# Altium PCB Power Regulation.PcbDoc
Units mil, origin at the board's own origin, x right, y up, seen from the top; angles counter-clockwise.
Board outline 6000 x 4000 mil, 2 copper layers (Top Layer, Bottom Layer); 5 components, 4 nets, 15 pads, 1 vias.
Unrouted connection lines stored in the file: 4.
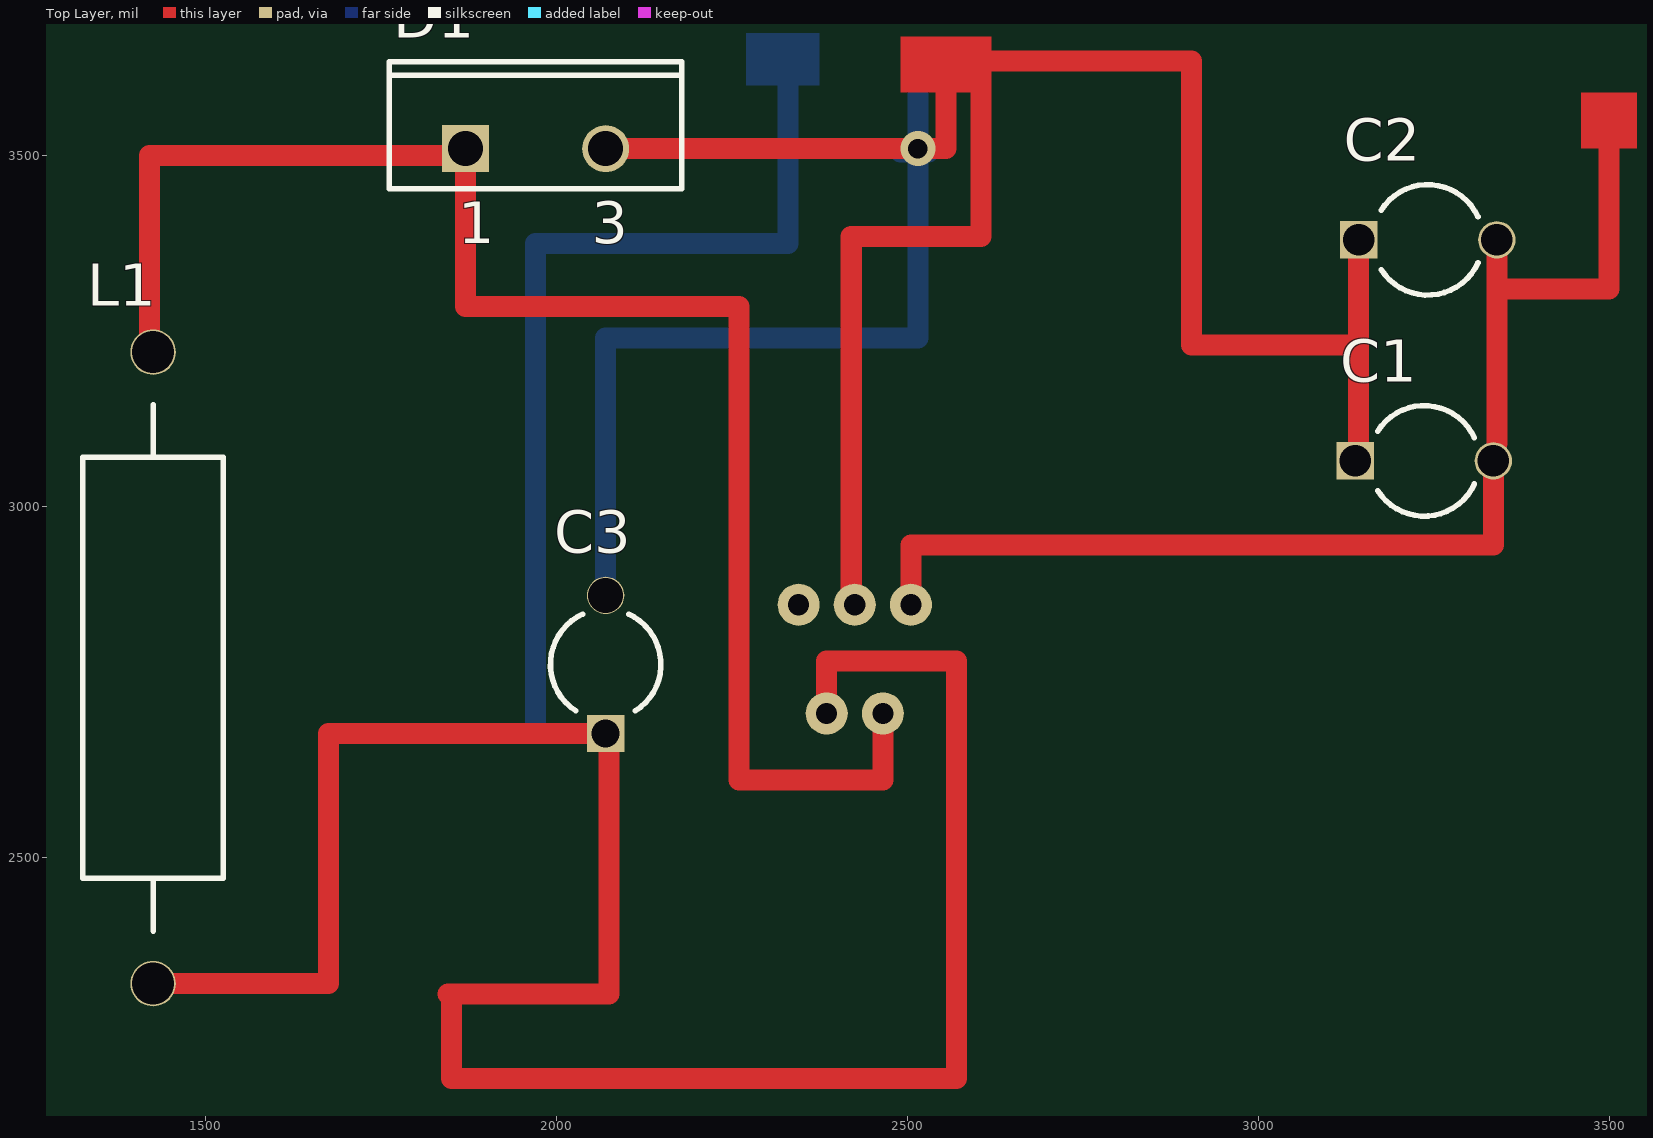
[diagram p0: Top Layer view]
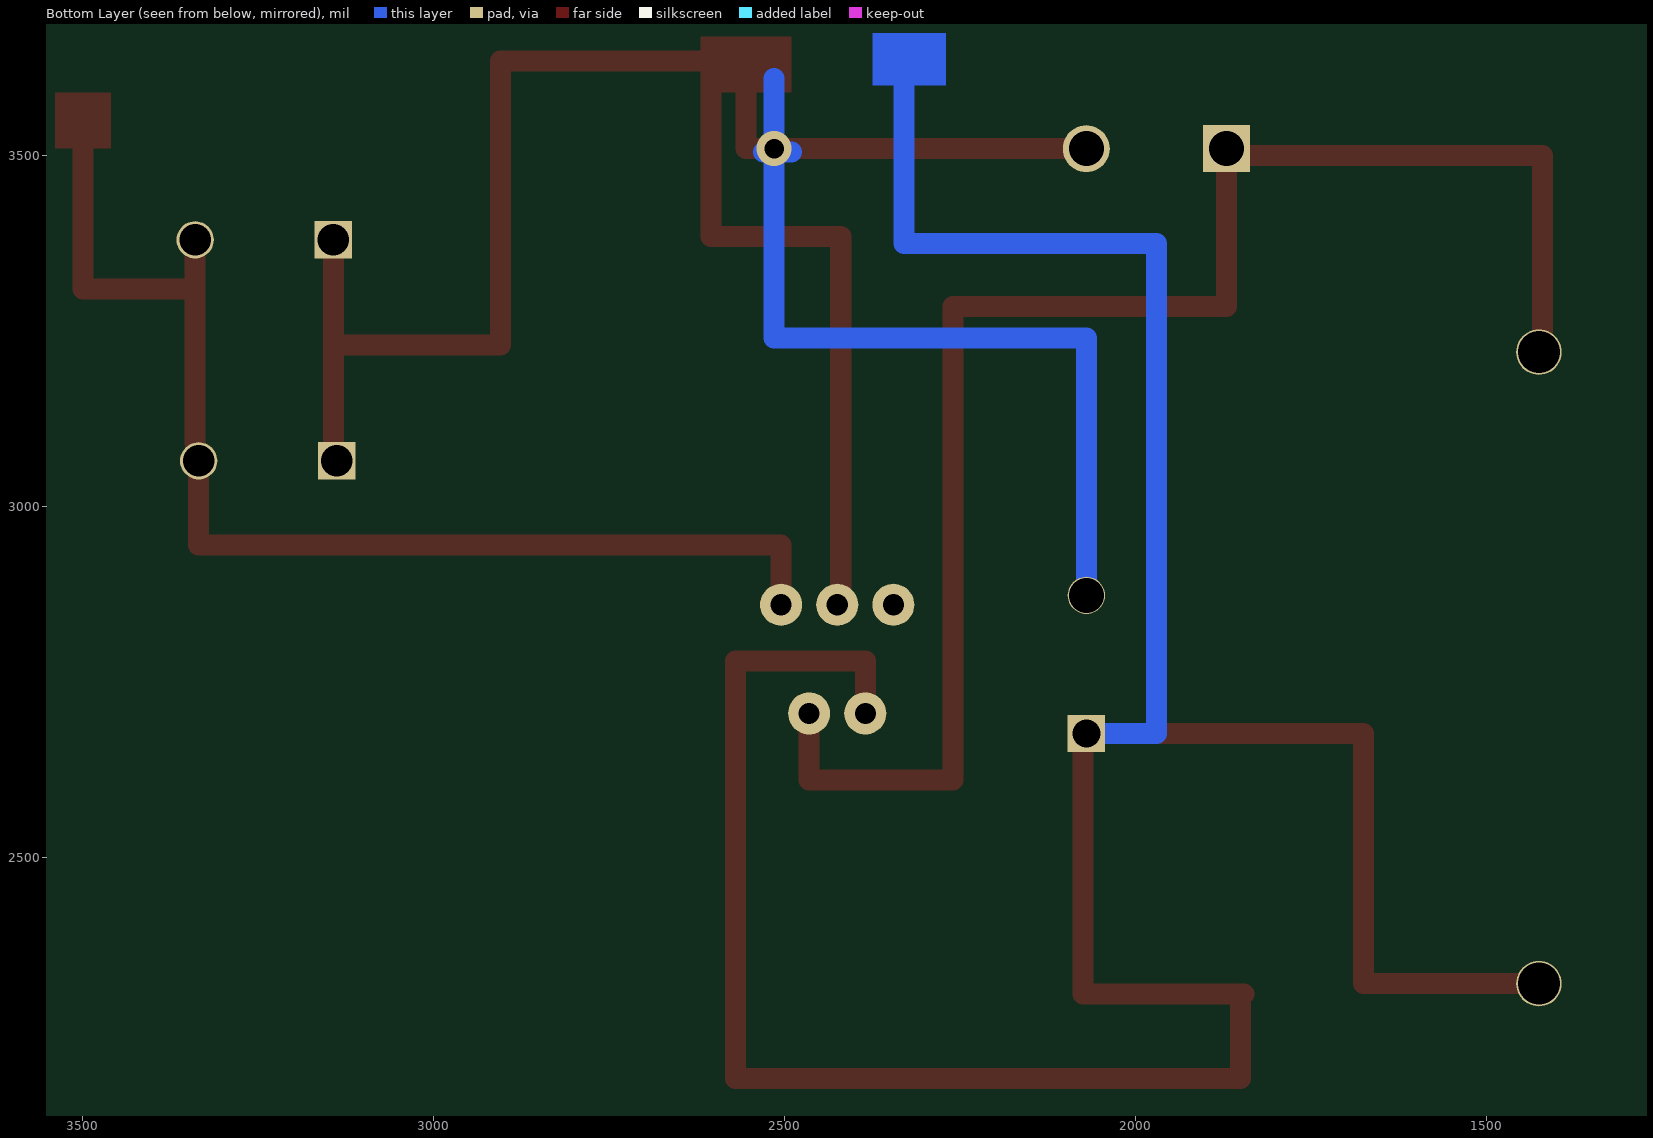
[diagram p1: Bottom Layer view, seen from below]

## Layer stack, top to bottom
Top Solder: solder mask 0.4, Solder Resist, Dk 3.5
Top Layer: signal copper 1.4
Dielectric 1: dielectric 12.6, FR-4, Dk 4.8
Bottom Layer: signal copper 1.4
Bottom Solder: solder mask 0.4, Solder Resist, Dk 3.5

## Board outline
1000,1000 7000,1000 7000,5000 1000,5000

## Design rules (kind name [scope] priority, off if disabled: settings)
Clearance [All] p1: gap=10
PolygonConnect [All] p1: connectstyle=Relief reliefconductorwidth=10 reliefentries=4 polygonreliefangle="90 Angle" airgapwidth=10
RoutingVias [All] p1: holewidth=28 width=50 viastyle="Through Hole" minholewidth=28 minwidth=50 maxholewidth=28 maxwidth=50
SolderMaskExpansion [All] p1: expansion=4
Width [All] p1: maxlimit=10 minlimit=10 preferedwidth=10
30 further rules are at their usual default settings.

## Components (designator, comment, footprint, x,y, rotation, side; value= is the part's Value field where it differs from the comment)
C1 "Cap2" CAPR5-4X5#1 3236.57,3065 r0 top
C2 "Cap2" CAPR5-4X5#1 3241.57,3380 r0 top
C3 "Cap2" CAPR5-4X5#2 2070,2775 r90 top
D1 "Diode 10TQ040" TO-220AC 1970,3510 r0 top
L1 "Inductor Iron" AXIAL-0.9 1425,2770 r270 top

## Footprints (in the part's own frame and the unit in brackets; to place one, negate y for a bottom-side part, rotate by r counter-clockwise, add the part's x,y. Pads: shape width x height; smd on the part's side, far side on the other; paste and mask are expansions set on the pad)
AXIAL-0.9 [mm] "Axial Device, Thru-Hole; 2 Leads; 0.9 in Pin Spacing"
  round 1.65 hole 1.524: 1(-11.43,0) 2(11.43,0)
  silkscreen extent -9.53,-2.54 9.53,2.54
CAPR5-4X5#1 [mm] "Capacitor; 2 Leads"
  rect 1.35x1.35 hole 1.143: 1(-2.5,0)
  round 1.35 hole 1.143: 2(2.5,0)
  silkscreen extent -1.69,-2 1.82,2
CAPR5-4X5#2 [mm] "Capacitor; 2 Leads"
  rect 1.35x1.35 hole 1.016: 1(-2.5,0)
  round 1.35 hole 1.27: 2(2.5,0)
  silkscreen extent -1.69,-2 1.82,2
TO-220AC [mm] "TO, Thru-Hole, Vertical, Heatsink Mounted; 3 In-Line Leads (1 Absent); Pitch 2.54 mm"
  rect 1.7x1.7 hole 1.27: 1(-2.54,0)
  round 1.7 hole 1.27: 3(2.54,0)
  silkscreen extent -5.3,-1.45 5.3,3.15

## Part data
C1 C2 C3: "Capacitor"
D1: "Schottky Rectifier"
L1: "Magnetic-Core Inductor"

## Free pads (board coordinates)
  round 60 hole 30: 0(2345,2860) 1(2425,2860) 2(2505,2860) 3(2385,2705) 4(2465,2705)

## Via types
v1: diameter 50, hole 28, Top Layer to Bottom Layer, 1 vias

## Nets (pads, with @x,y where several pads share a name; then routed paths per layer and width w, separated by ;. In a path a pad name is that pad's centre, name@x,y a point inside that pad or via, vN(x,y) a via of type N, cw(c..) or ccw(c..) an arc to the next point about the centre after c; other vN are vias at no path point)
GND: C1.2 C2.2 C3.2 D1.3 | length 290
  Top Layer w30: C1.2@3340,3090 C2.2
NetC3_1: C3.1 L1.2
NetD1_1: D1.1 L1.1
VCC: C1.1 C2.1 | length 290
  Top Layer w30: C1.1@3143.15,3090 C2.1
copper on no net: | length 12188.1
  Top Layer w10: 1845,2305 1850,2305 ; 1865,3500 1870,3500 ; 1870,3510 1875,3510 ; 2070,3510 2080,3510 ; 2380,2705 2385,2705 ; 2420,2860 2425,2860
  Top Layer w30: 1420,3235 1420,3500 1865,3500 ; 1425,2320 1675,2320 1675,2676.57 2075,2676.57 2075,2305 1845,2305 ; 1850,2305 1850,2185 2570,2185 2570,2780 2385,2780 2385,2705 ; 1870,3500 1870,3285 2080,3285 2260,3285 2260,2610 2465,2610 2465,2705 ; 2070,3510 2555,3510 2555,3630 ; 2420,2860 2420,3385 2605,3385 2605,3630 ; 2505,2860 2505,2945 3335,2945 3335,3065 ; 2585,3635 2905,3635 2905,3230 3140,3230 ; 3340,3310 3500,3310 3500,3545
  Bottom Layer w30: 2070,2676.57 1970,2676.57 1970,3375 2330,3375 2330,3605 ; 2070,2873.43 2070,3240 2515,3240 2515,3610 ; 2490,3505 v1@2530,3505
  other v1: 2515,3510

## Other copper
Top Layer:
  rectangle: 2490,3590 2620,3670
  rectangle: 3460,3510 3540,3590
Bottom Layer:
  rectangle: 2270,3600 2375,3675

## Text inside footprints (layer, text, board x,y; h text height)
D1: Top Overlay "1" at 1860.16,3375.16 h59.06; Top Overlay "3" at 2050.32,3375.16 h59.06